# EAGLE board espcam (EAGLE 7.5.0)
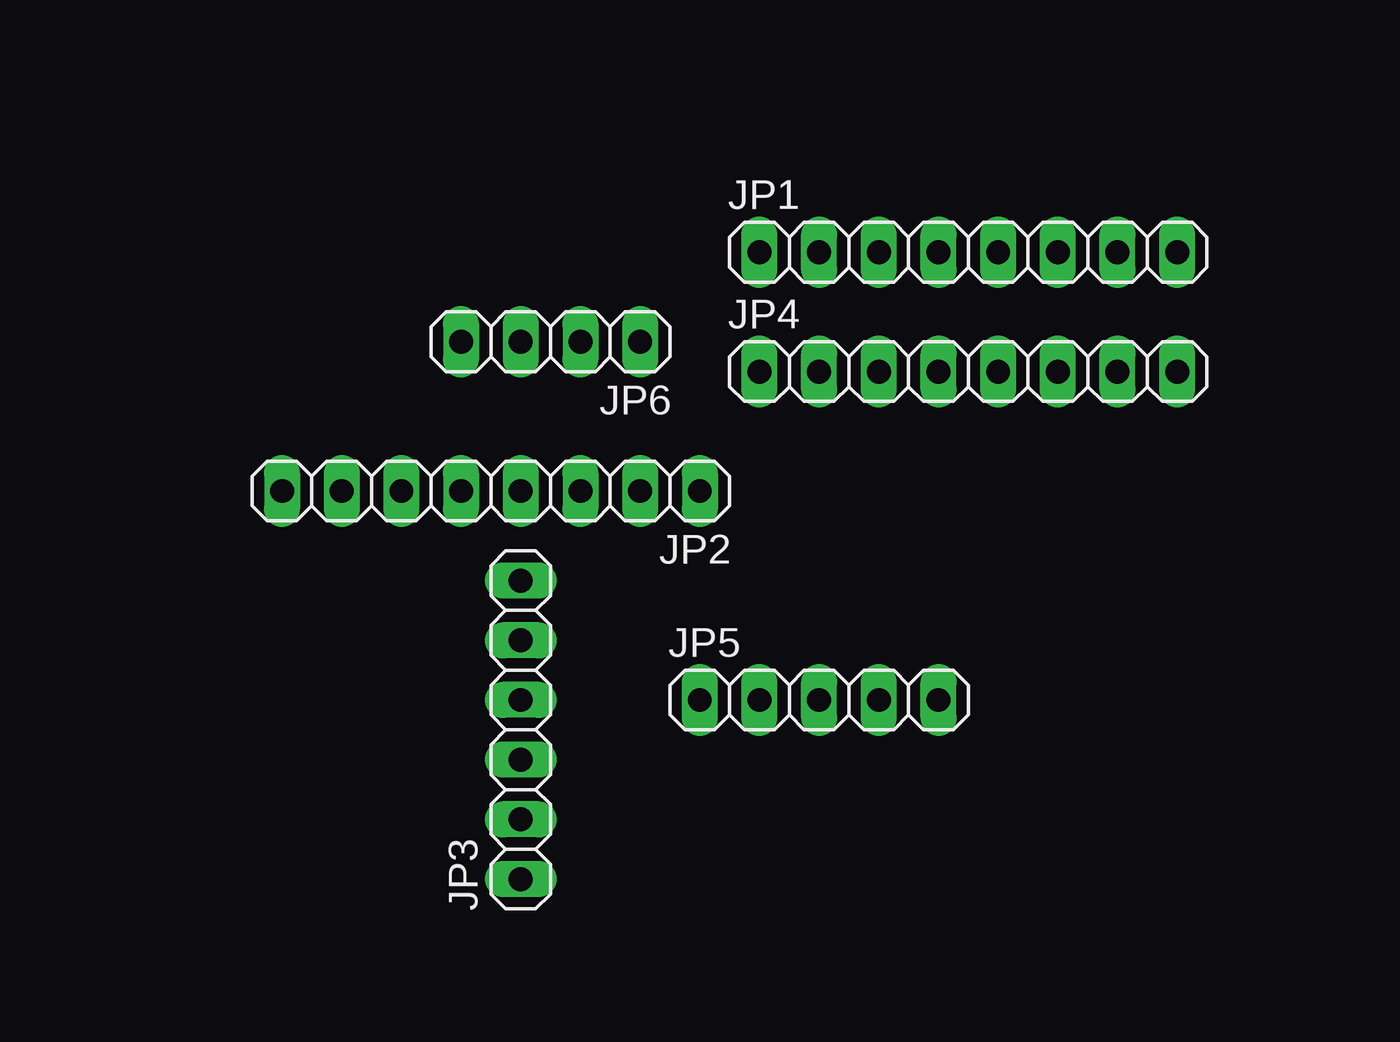
[diagram p0: board, top side]
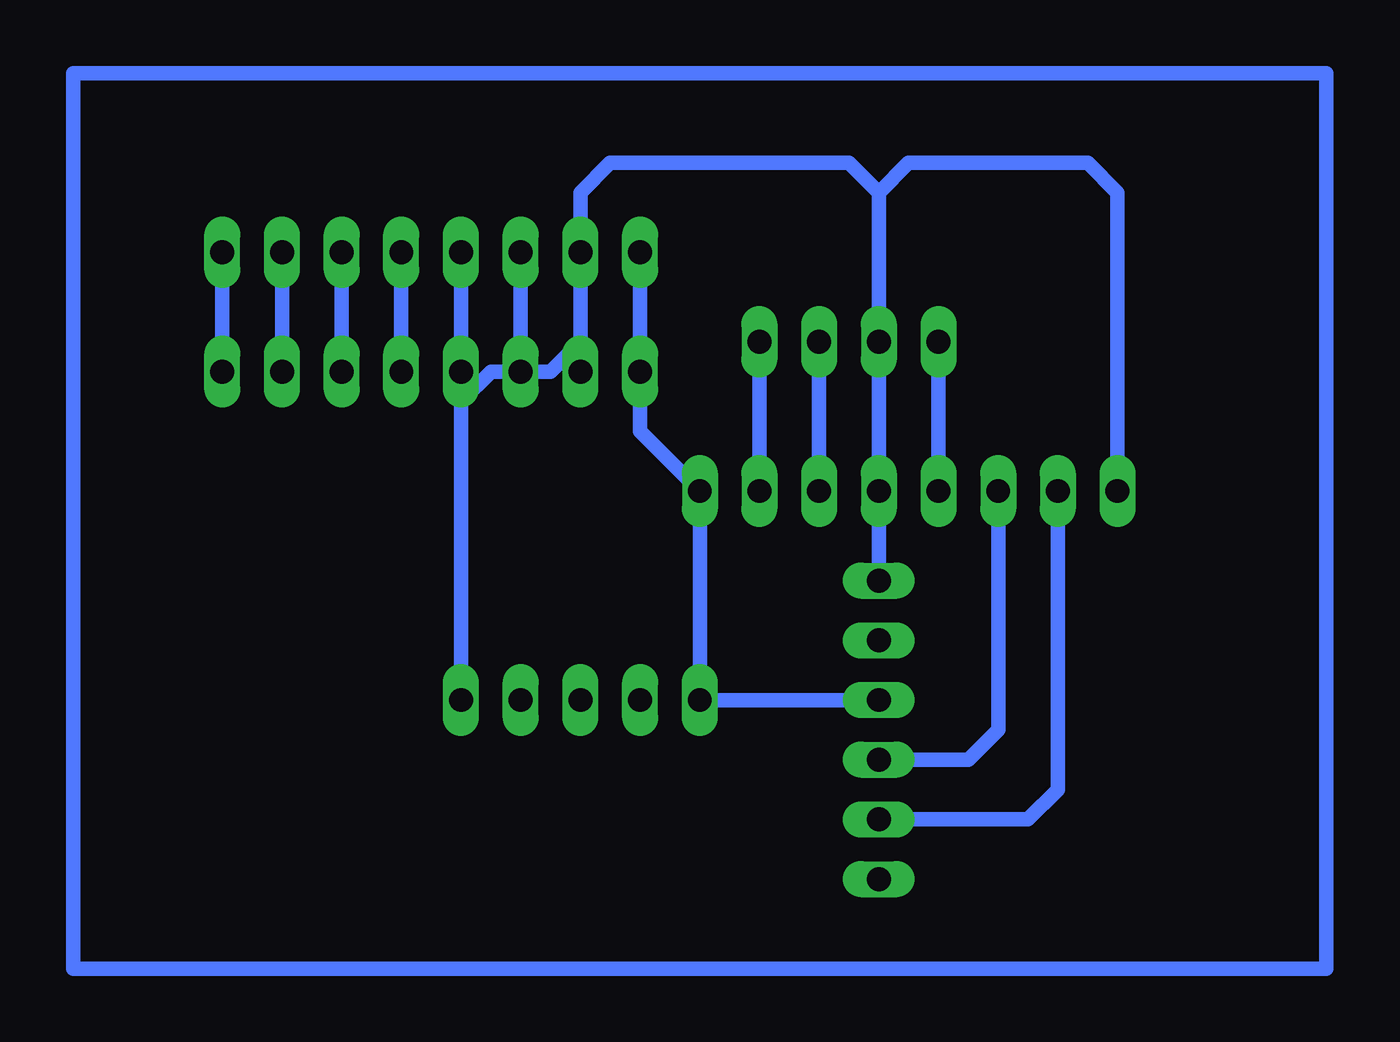
[diagram p1: board, bottom side, seen from below]

No outline drawn. Coordinates in mm, seen from the top.
Copper layers (1*16): Top 0.035mm / dielectric 1.5mm / Bottom 0.035mm
Design rules "default": minimum track width 10mil, minimum drill 24mil, track to track 8mil, track to pad 8mil, pad to pad 8mil, via to via 8mil, smd to smd 8mil, copper to edge 40mil, drill to drill 8mil, minimum pad ring 10mil, minimum via ring 8mil, stop-mask expansion 4mil, vias tented up to drill 0mil, thermal gap 10mil

## Footprints (pad centres in the part's own frame; a part is rotated, then mirrored left to right if it is on the bottom)
1X08 = drill 1.016 long: 1 -8.89,0; 2 -6.35,0; 3 -3.81,0; 4 -1.27,0; 5 1.27,0; 6 3.81,0; 7 6.35,0; 8 8.89,0
1X06 = drill 1.016 long: 1 -6.35,0; 2 -3.81,0; 3 -1.27,0; 4 1.27,0; 5 3.81,0; 6 6.35,0
1X05 = drill 1.016 long: 1 -5.08,0; 2 -2.54,0; 3 0,0; 4 2.54,0; 5 5.08,0
1X04 = drill 1.016 long: 1 -3.81,0; 2 -1.27,0; 3 1.27,0; 4 3.81,0

## Placement (x,y rotation side)
JP1  [1X08]  64.77,69.85 0 top
JP2  [1X08]  44.45,59.69 180 top
JP3  [1X06]  45.72,49.53 90 top
JP4  [1X08]  64.77,64.77 0 top
JP5  [1X05]  58.42,50.8 0 top
JP6  [1X04]  46.99,66.04 180 top

## Library data of the parts
JP1-JP6 = pinhead

## Nets
3V3: JP2.1
5V: JP1.1 JP3.4 JP4.1 JP5.1
GND: JP1.2 JP2.4 JP2.8 JP3.6 JP4.2 JP5.5 JP6.3
IO0: JP2.3 JP6.2
IO2: JP1.7 JP4.7
IO4: JP1.8 JP4.8
IO12: JP1.3 JP4.3
IO13: JP1.4 JP4.4
IO14: JP1.6 JP4.6
IO15: JP1.5 JP4.5
IO16: JP2.2 JP6.1
RX: JP2.7 JP3.2
TX: JP2.6 JP3.3
VOUT: JP2.5 JP6.4

## Tracks (layer width: path | path; a pad name or v marks a point on that pad's centre or on a via)
5V
  Bottom 0.61: JP1.1 JP4.1 55.88,62.23 53.34,59.69 JP5.1 JP3.4
GND
  Bottom 0.61: JP5.5 63.5,63.5 62.23,64.77 59.69,64.77 58.42,66.04 | 58.42,66.04 JP4.2 | JP3.6 JP2.4 JP6.3 45.72,72.39 | 45.72,72.39 44.45,73.66 36.83,73.66 35.56,72.39 JP2.8 | 58.42,66.04 JP1.2 58.42,72.39 57.15,73.66 46.99,73.66 45.72,72.39
IO0
  Bottom 0.61: JP2.3 JP6.2
IO2
  Bottom 0.61: JP1.7 JP4.7
IO4
  Bottom 0.61: JP1.8 JP4.8
IO12
  Bottom 0.61: JP1.3 JP4.3
IO13
  Bottom 0.61: JP1.4 JP4.4
IO14
  Bottom 0.61: JP1.6 JP4.6
IO15
  Bottom 0.61: JP1.5 JP4.5
IO16
  Bottom 0.61: JP6.1 JP2.2
N$1
  Bottom 0.61: 26.67,77.47 26.67,39.37 80.01,39.37 80.01,77.47 26.67,77.47
RX
  Bottom 0.61: JP2.7 38.1,46.99 39.37,45.72 JP3.2
TX
  Bottom 0.61: JP2.6 40.64,49.53 41.91,48.26 JP3.3
VOUT
  Bottom 0.61: JP6.4 JP2.5